# EAGLE board tulip breakout (EAGLE 9.6.2)
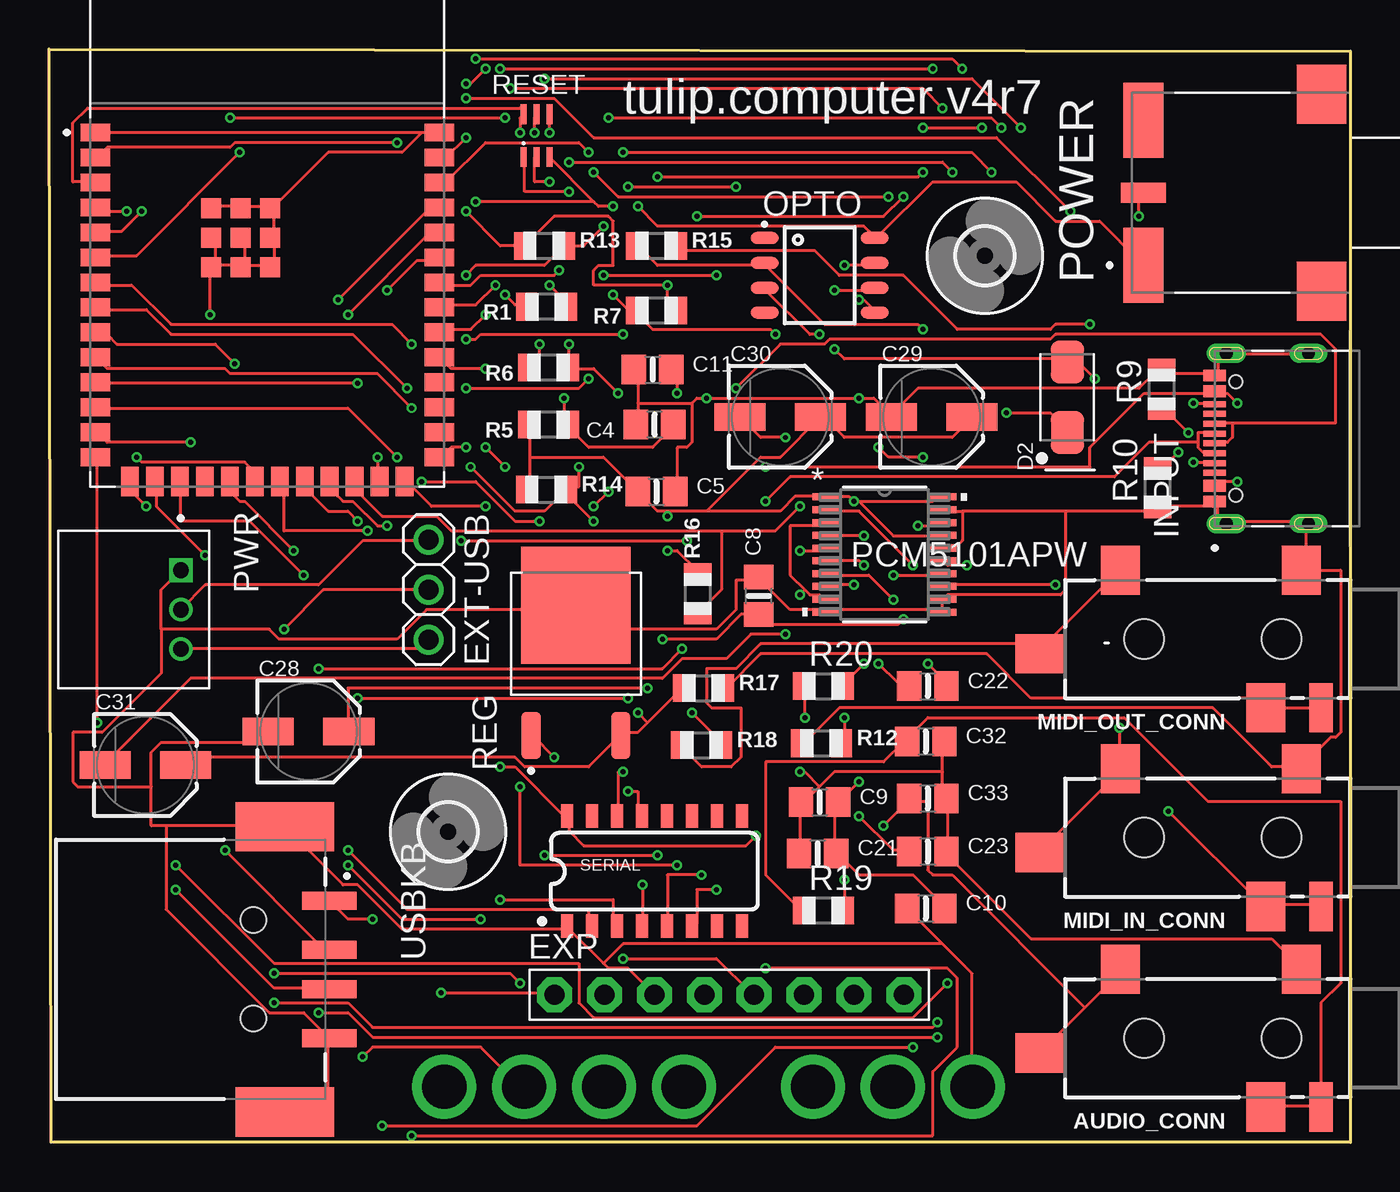
[diagram p0: board, top side]
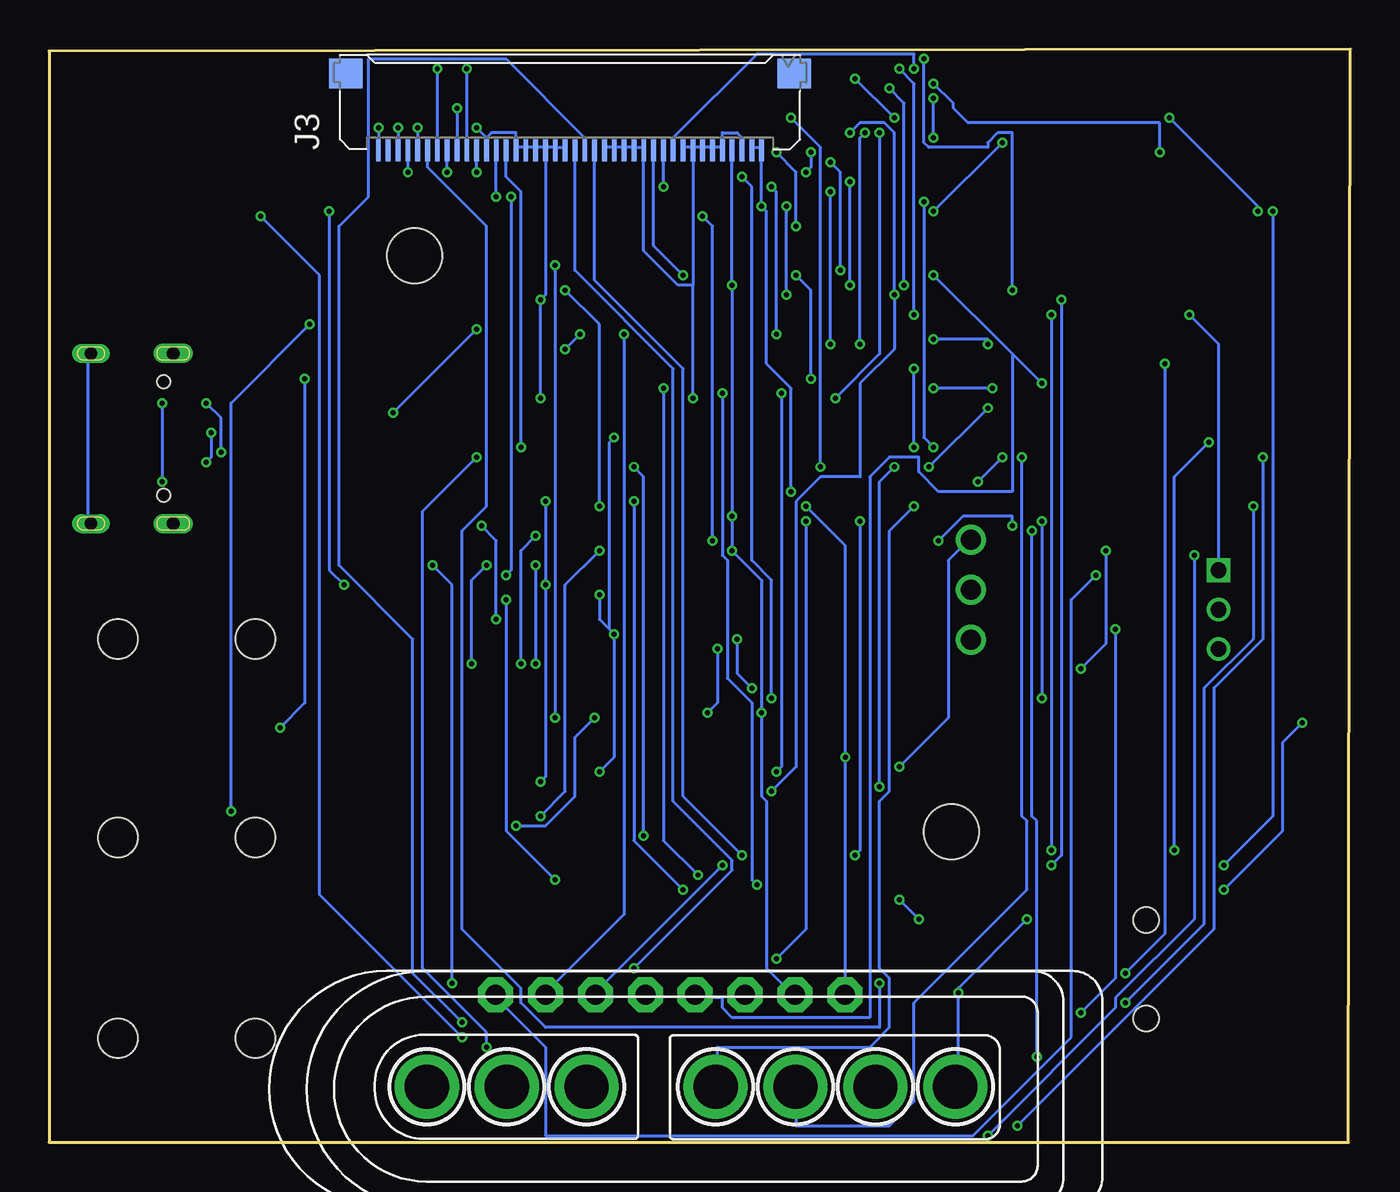
[diagram p1: board, bottom side, seen from below]

Size 66.2 x 55.6 mm. Coordinates in mm from the lower left corner, seen from the top.
Outline: 0.1,0 0,55.6 66.2,55.5 66.2,0 0.1,0
Copper layers (1*16): Top 0.035559375mm / dielectric 1.6mm / Bottom 0.035559375mm
Design rules "oshpark-2layer *": minimum track width 6mil, minimum drill 10mil, track to track 6mil, track to pad 6mil, pad to pad 6mil, via to via 6mil, smd to smd 6mil, copper to edge 0mil, drill to drill 6mil, minimum pad ring 5mil, minimum via ring 5mil, stop-mask expansion 2.5mil, vias tented up to drill 0mil, thermal gap 10mil
Net classes: 1 power: width 0.178 mm

## Footprints (pad centres in the part's own frame; a part is rotated, then mirrored left to right if it is on the bottom)
4UCONN_19269 = smd 2 x 2.5: 1 2.5,-3.5; 2 11.7,-3.5; 3 4.3,3.5 | smd 2.5 x 2: 4 15.8,0.75 | smd 1.2 x 2.5: 5 1.5,3.5 | hole 2: 3.5,0; 10.5,0
0805-NO = smd 1.24 x 1.5: 1 -0.95,0; 2 0.95,0
PANASONIC_C = smd 2.6 x 1.4: + 2.05,0; - -2.05,0
DIOM449X264X300L114X135N = smd 2.17 x 1.69: A 1.795,0; C -1.795,0
XCVR_ESP32-S3-WROOM-2-N32R8V = smd 1.5 x 0.9: 1 -8.75,5.26; 2 -8.75,3.99; 3 -8.75,2.72; 4 -8.75,1.45; 5 -8.75,0.18; 6 -8.75,-1.09; 7 -8.75,-2.36; 8 -8.75,-3.63; 9 -8.75,-4.9; 10 -8.75,-6.17; 11 -8.75,-7.44; 12 -8.75,-8.71; 13 -8.75,-9.98; 14 -8.75,-11.25; 27 8.75,-11.25; 28 8.75,-9.98; 29 8.75,-8.71; 30 8.75,-7.44; 31 8.75,-6.17; 32 8.75,-4.9; 33 8.75,-3.63; 34 8.75,-2.36; 35 8.75,-1.09; 36 8.75,0.18; 37 8.75,1.45; 38 8.75,2.72; 39 8.75,3.99; 40 8.75,5.26 | smd 0.9 x 1.5: 15 -6.985,-12.5; 16 -5.715,-12.5; 17 -4.445,-12.5; 18 -3.175,-12.5; 19 -1.905,-12.5; 20 -0.635,-12.5; 21 0.635,-12.5; 22 1.905,-12.5; 23 3.175,-12.5; 24 4.445,-12.5; 25 5.715,-12.5; 26 6.985,-12.5 | smd 1 x 1: 41_1 -1.36,-0.09; 41_2 -2.86,-0.09; 41_3 0.14,-0.09; 41_4 -2.86,-1.59; 41_5 -1.36,-1.59; 41_6 0.14,-1.59; 41_7 -2.86,1.41; 41_8 -1.36,1.41; 41_9 0.14,1.41
1X08-BIG = drill 1.016 pad 1.778 octagon: 1 -8.89,0; 2 -6.35,0; 3 -3.81,0; 4 -1.27,0; 5 1.27,0; 6 3.81,0; 7 6.35,0; 8 8.89,0
1X03 = drill 1.016: 1 -2.54,0; 2 0,0; 3 2.54,0
2,8 = hole 2.8: 0,0
VALCON_CSP-USC16-TR = smd 0.3 x 1.14: A1 -3.35,0; A4 -2.55,0; A5 -1.25,0; A6 -0.25,0; A7 0.25,0; A8 1.25,0; A9 2.55,0; A12 3.35,0; B1 3.05,0; B4 2.25,0; B5 1.75,0; B6 0.75,0; B7 -0.75,0; B8 -1.75,0; B9 -2.25,0; B12 -3.05,0 | drill 0.65 pad 1 long: S1 -4.325,-0.59; S2 4.325,-0.59 | drill 0.65 pad 0.9 long: S3 -4.325,-4.77; S4 4.325,-4.77 | hole 0.65: -2.89,-1.07; 2.89,-1.07
XF2M-4015-1F-REVERSE = smd 1.1 x 0.25: 1 -2.54,9.75; 2 -2.54,9.25; 3 -2.54,8.75; 4 -2.54,8.25; 5 -2.54,7.75; 6 -2.54,7.25; 7 -2.54,6.75; 8 -2.54,6.25; 9 -2.54,5.75; 10 -2.54,5.25; 11 -2.54,4.75; 12 -2.54,4.25; 13 -2.54,3.75; 14 -2.54,3.25; 15 -2.54,2.75; 16 -2.54,2.25; 17 -2.54,1.75; 18 -2.54,1.25; 19 -2.54,0.75; 20 -2.54,0.25; 21 -2.54,-0.25; 22 -2.54,-0.75; 23 -2.54,-1.25; 24 -2.54,-1.75; 25 -2.54,-2.25; 26 -2.54,-2.75; 27 -2.54,-3.25; 28 -2.54,-3.75; 29 -2.54,-4.25; 30 -2.54,-4.75; 31 -2.54,-5.25; 32 -2.54,-5.75; 33 -2.54,-6.25; 34 -2.54,-6.75; 35 -2.54,-7.25; 36 -2.54,-7.75; 37 -2.54,-8.25; 38 -2.54,-8.75; 39 -2.54,-9.25; 40 -2.54,-9.75 | smd 1.5 x 1.7: M1 1.36,11.4; M2 1.36,-11.4
SOIC127P610X331-8N = smd 1.4 x 0.6: 1 -2.8,1.905; 2 -2.8,0.635; 3 -2.8,-0.635; 4 -2.8,-1.905; 5 2.8,-1.905; 6 2.8,-0.635; 7 2.8,0.635; 8 2.8,1.905
PW20_TEX = smd 1.473 x 0.356: 1 -2.921,2.925; 2 -2.921,2.275; 3 -2.921,1.625; 4 -2.921,0.975; 5 -2.921,0.325; 6 -2.921,-0.325; 7 -2.921,-0.975; 8 -2.921,-1.625; 9 -2.921,-2.275; 10 -2.921,-2.925; 11 2.921,-2.925; 12 2.921,-2.275; 13 2.921,-1.625; 14 2.921,-0.975; 15 2.921,-0.325; 16 2.921,0.325; 17 2.921,0.975; 18 2.921,1.625; 19 2.921,2.275; 20 2.921,2.925
SW_500ASSP1SM6QE = smd 3.81 x 2.03: 1 -3.685,4.535; 3 3.685,4.535 | smd 1.02 x 2.29: 2 0,4.535 | smd 3 x 2.5: S1 -5,-4.535; S2 5,-4.535
TE_440055-3 = drill 0.8 pad 1.15 square: 1 0,0 | drill 0.8 pad 1.15: 2 2.007,0; 3 4.013,0
R0805 = smd 1.1 x 1.4: 1 -1,0; 2 1,0
DPAK456P972X240-3N = smd 2.4 x 0.98: 1 -4.2,2.28; 2 -4.2,-2.28 | smd 5.96 x 5.57: 3 2.42,0
SOT236 = smd 0.3 x 1: 1 -0.66,-1.09; 2 0,-1.09; 3 0.66,-1.09; 4 0.66,1.09; 5 0,1.09; 6 -0.66,1.09
SO016 = smd 0.6 x 1.2: 1 -4.445,-2.8; 2 -3.175,-2.8; 3 -1.905,-2.8; 4 -0.635,-2.8; 5 0.635,-2.8; 6 1.905,-2.8; 7 3.175,-2.8; 8 4.445,-2.8; 9 4.445,2.8; 10 3.175,2.8; 11 1.905,2.8; 12 0.635,2.8; 13 -0.635,2.8; 14 -1.905,2.8; 15 -3.175,2.8; 16 -4.445,2.8
SNESCONN = drill 2.25 pad 3.25: 5V 0,4.064; CLOCK 4.064,4.064; D0 12.192,4.064; D1 18.756,4.064; GND 26.884,4.064; IO 22.82,4.064; LATCH 8.128,4.064
SAMTEC_USB-A-S-X-X-SM2 = smd 0.9 x 2.8: 01 -3.5,3.85; 02 -1,3.85; 03 1,3.85; 04 3.5,3.85 | smd 2.5 x 5: S1 -7.25,1.6; S2 7.25,1.6 | hole 1.3: -2.5,0; 2.5,0

## Placement (x,y rotation side)
AUDIO_CONN  19269  [4UCONN_19269]  66.2,5.3 180 top
C4  4.7uF  [0805-NO]  30.8,36.5 180 top
C5  4.7uF  [0805-NO]  30.9,33.1 0 top
C8  0.1uF  [0805-NO]  36.1,27.8 90 top
C9  0.1uF  [0805-NO]  39.2,17.3 0 top
C10  0.1uF  [0805-NO]  44.6,11.9 0 top
C11  10uF  [0805-NO]  30.7,39.3 0 top
C21  0.1uF  [0805-NO]  39.1,14.7 0 top
C22  2.2uF  [0805-NO]  44.7,23.2 0 top
C23  2.2uF  [0805-NO]  44.7,14.8 0 top
C28  10uF  [PANASONIC_C]  13.2,20.9 0 top
C29  10uF  [PANASONIC_C]  44.9,36.9 0 top
C30  10uF  [PANASONIC_C]  37.2,36.9 0 top
C31  10uF  [PANASONIC_C]  4.9,19.2 0 top
C32  2.2nF  [0805-NO]  44.6,20.4 0 top
C33  2.2nF  [0805-NO]  44.7,17.5 0 top
D2  EGF1A  [DIOM449X264X300L114X135N]  51.8,37.9 90 top
ESP32S3  ESP32-S3-WROOM-2-N32R8V  [XCVR_ESP32-S3-WROOM-2-N32R8V]  11.1,46.1 0 top
EXP  [1X08-BIG]  34.6,7.5 0 top
EXT-USB  [1X03]  19.3,28.1 270 top
H1  MOUNT-HOLE2.8  [2,8]  20.3,15.8 0 top
H2  MOUNT-HOLE2.8  [2,8]  47.6,45.1 0 top
INPUT  CSP-USC16-TR  [VALCON_CSP-USC16-TR]  59.3,35.8 90 top
J3  40PINFPC15-1F-REV  [XF2M-4015-1F-REVERSE]  39.7,53 90 bottom
MIDI_IN_CONN  19269  [4UCONN_19269]  66.2,15.5 180 top
MIDI_OUT_CONN  19269  [4UCONN_19269]  66.2,25.6 180 top
OPTO  VO0601T  [SOIC127P610X331-8N]  39.2,44.1 0 top
PCM  PCM5101APW  [PW20_TEX]  42.5,29.9 0 top
POWER  500ASSP1SM6QE  [SW_500ASSP1SM6QE]  60.2,48.3 90 top
PWR  440055-3  [TE_440055-3]  6.7,29.1 270 top
R1  100k  [R0805]  25.3,42.5 180 top
R5  10k  [R0805]  25.4,36.5 180 top
R6  100k  [R0805]  25.4,39.4 180 top
R7  10k  [R0805]  30.9,42.3 180 top
R9  5.1K  [R0805]  56.6,38.3 90 top
R10  5.1K  [R0805]  56.4,33.3 90 top
R12  4.7K  [R0805]  39.3,20.3 0 top
R13  4.7K  [R0805]  25.2,45.6 0 top
R14  4.7K  [R0805]  25.3,33.2 0 top
R15  220  [R0805]  30.9,45.6 0 top
R16  470  [R0805]  33,27.9 90 top
R17  33  [R0805]  33.3,23.1 0 top
R18  10  [R0805]  33.2,20.2 0 top
R19  470  [R0805]  39.4,11.8 0 top
R20  470  [R0805]  39.4,23.2 0 top
REG  LD29150DT33R  [DPAK456P972X240-3N]  26.8,24.9 90 top
RESET  MBT3904DW1T1G  [SOT236]  24.8,51.2 0 top
SERIAL  CH340C  [SO016]  30.8,13.8 0 top
SNES  SNESCONN  [SNESCONN]  20.1,6.9 180 bottom
USBKB  USB-A-S-X-X-SM2  [SAMTEC_USB-A-S-X-X-SM2]  10.4,8.8 270 top

## Library data of the parts
AUDIO_CONN C4 C5 C8-C11 C21-C23 C28-C33 MIDI_IN_CONN MIDI_OUT_CONN = microbuilder
D2 = EGF1A; AVAILABILITY: In Stock; DESCRIPTION: Diode Standard 50 V 1A Surface Mount DO-214AC (SMA); MF: ON Semiconductor; MP: EGF1A; PACKAGE: SMA-2 ON Semiconductor; PRICE: None; PURCHASE-URL: https://pricing.snapeda.com/search/part/EGF1A/?ref=eda
ESP32S3 = ESP32-S3-WROOM-2-N32R8V; AVAILABILITY: In Stock; DESCRIPTION: Bluetooth, WiFi 802.11b/g/n, Bluetooth v5.0 Transceiver Module 2.4GHz PCB Trace Surface Mount; MF: Espressif Systems; MP: ESP32-S3-WROOM-2-N32R8V; PACKAGE: Package; PRICE: None; PURCHASE-URL: https://pricing.snapeda.com/search/part/ESP32-S3-WROOM-2-N32R8V/?ref=eda
EXP EXT-USB J3 R1 R5-R7 R9 R10 R12-R20 = adafruit
H1 H2 = holes
INPUT = CSP-USC16-TR; AVAILABILITY: In Stock; DESCRIPTION: CSP-USC16-TR Valcon USB Type C Surface Mount PCB Socket; MF: Valcon; MP: CSP-USC16-TR; PACKAGE: None; PRICE: None; PURCHASE-URL: https://pricing.snapeda.com/search/part/CSP-USC16-TR/?ref=eda
OPTO = VO0601T; DESCRIPTION: Logic Output Optoisolator 10MBd Open Drain 4000Vrms 1 Channel 5kV/µs CMTI 8-SOIC; DIGI-KEY_PART_NUMBER: 751-1377-2-ND; MF: Vishay Semiconductors; MP: VO0601T; PACKAGE: None; PURCHASE-URL: https://pricing.snapeda.com/search/part/VO0601T/?ref=eda
PCM = pcm5101apw; COPYRIGHT: Copyright (C) 2022 Ultra Librarian. All rights reserved.; DIGI-KEY_PART_NUMBER_1: PCM5101APW-ND; MANUFACTURER_PART_NUMBER: PCM5101APW; MFR_NAME: Texas Instruments
POWER = 500ASSP1SM6QE; DESCRIPTION: Slide Switch SPDT Surface Mount, Right Angle; DIGI-KEY_PART_NUMBER: EG5810TR-ND; MF: E-Switch; MP: 500ASSP1SM6QE; PACKAGE: None; PURCHASE-URL: https://pricing.snapeda.com/search/part/500ASSP1SM6QE/?ref=eda
PWR = 440055-3; COMMENT: 440055-3; DESCRIPTION: Connector Header Through Hole, Right Angle 3 position 0.079 (2.00mm); DIGI-KEY_PART_NUMBER: A100044-ND; EU_ROHS_COMPLIANCE: Compliant; MF: TE Connectivity; MP: 440055-3; PACKAGE: None; PURCHASE-URL: https://pricing.snapeda.com/search/part/440055-3/?ref=eda
REG = LD29150DT33R; DESCRIPTION: Linear Voltage Regulator IC Positive Fixed 1 Output 1.5A DPAK; DIGI-KEY_PART_NUMBER: 497-1496-2-ND; MF: STMicroelectronics; MP: LD29150DT33R; PACKAGE: TO-252 STMicroelectronics; PURCHASE-URL: https://pricing.snapeda.com/search/part/LD29150DT33R/?ref=eda
RESET = MBT3904DW1T1G; AVAILABILITY: In Stock; DESCRIPTION: Bipolar (BJT) Transistor Array 2 NPN (Dual) 40V 200mA 300MHz 150mW Surface Mount SC-88/SC70-6/SOT-363; MF: ON Semiconductor; MP: MBT3904DW1T1G; PACKAGE: SC-88-6 ON Semiconductor; PRICE: None; PURCHASE-URL: https://pricing.snapeda.com/search/part/MBT3904DW1T1G/?ref=eda
SERIAL = SparkFun-IC-Comms; PROD_ID: IC-14038
SNES = gamepad-conn
USBKB = USB-A-S-X-X-SM2; AVAILABILITY: In Stock; DESCRIPTION: USB-A (USB TYPE-A) USB 2.0 Receptacle Connector 4 Position Surface Mount, Right Angle; MF: Samtec; MP: USB-A-S-F-W-SM2-TR; PACKAGE: None; PRICE: None; PURCHASE-URL: https://pricing.snapeda.com/search/part/USB-A-S-F-W-SM2-TR/?ref=eda

## Nets
3V3: C5.1 C9.2 C10.2 C21.2 C29.+ C30.+ C31.+ ESP32S3.2 EXP.2 J3.37 PCM.1 PCM.8 PCM.17 PCM.20 R5.2 R7.1 R13.1 R14.1 R16.2 R17.1 REG.2
5V: EXP.1 J3.39 J3.40 OPTO.8 POWER.1 REG.1 SNES.5V USBKB.01
5V_IN: EXT-USB.3 PWR.3
5V_USB: EXT-USB.1 INPUT.A4 INPUT.A9 INPUT.B4 INPUT.B9 PWR.2 SERIAL.16
!DTR: R1.2 RESET.4 SERIAL.13
!RTS: R6.1 RESET.1 SERIAL.14
AGND: AUDIO_CONN.1 C9.1 C21.1 C23.2 C30.- C31.- C32.2 C33.2 PCM.3 PCM.9
B6: ESP32S3.20 J3.14
B7: ESP32S3.23 J3.13
BCLK: ESP32S3.39 PCM.13
BLEN: ESP32S3.32 J3.10
D+: ESP32S3.14 USBKB.03
D-: ESP32S3.13 USBKB.02
DE: ESP32S3.35 J3.7
DIN: ESP32S3.38 PCM.14
DN1: INPUT.A7 INPUT.B7 SERIAL.6
DP1: INPUT.A6 INPUT.B6 SERIAL.5
ESP32_EN: C4.1 ESP32S3.3 R5.1 RESET.6
EXT-USB: EXT-USB.2 POWER.2
G5: ESP32S3.12 J3.23
G6: ESP32S3.15 J3.22
G7: ESP32S3.16 J3.21
GND: C4.2 C5.2 C8.2 C10.1 C11.1 C28.- C29.- ESP32S3.1 ESP32S3.40 ESP32S3.41_1 ESP32S3.41_2 ESP32S3.41_3 ESP32S3.41_4 ESP32S3.41_5 ESP32S3.41_6 ESP32S3.41_7 ESP32S3.41_8 ESP32S3.41_9 EXP.3 INPUT.A1 INPUT.A12 INPUT.B1 INPUT.B12 INPUT.S1 INPUT.S2 INPUT.S3 INPUT.S4 J3.5 J3.12 J3.15 J3.16 J3.17 J3.18 J3.19 J3.20 J3.24 J3.25 J3.26 J3.27 J3.28 J3.32 J3.33 J3.34 J3.35 J3.36 J3.38 MIDI_IN_CONN.1 MIDI_OUT_CONN.1 OPTO.5 PCM.10 PCM.11 PCM.12 PCM.16 PCM.19 PWR.1 R9.2 R10.1 R12.1 REG.3 SERIAL.1 SNES.GND USBKB.04 USBKB.S1 USBKB.S2
GPIO10: ESP32S3.18
HSYNC: ESP32S3.33 J3.9
INT: ESP32S3.5 J3.1
IO0: ESP32S3.27 EXP.7 R7.2 RESET.3
IO9: ESP32S3.17 EXP.8
IO38: ESP32S3.31 EXP.6
JOY_CLK: ESP32S3.21 SNES.CLOCK
JOY_D0: ESP32S3.26 SNES.D0
JOY_LATCH: ESP32S3.25 SNES.LATCH
LOUT: AUDIO_CONN.2 AUDIO_CONN.4 C33.1 R20.1
LRC: ESP32S3.4 PCM.15
MIDI_IN: ESP32S3.24 OPTO.6 R16.1
MIDI_IN_SINK: D2.A MIDI_IN_CONN.2 MIDI_IN_CONN.4 OPTO.3
MIDI_IN_SOURCE: MIDI_IN_CONN.3 MIDI_IN_CONN.5 R15.2
MIDI_OUT: ESP32S3.19 R18.2
MIDI_OUT_SINK: MIDI_OUT_CONN.2 MIDI_OUT_CONN.4 R18.1
MIDI_OUT_SOURCE: MIDI_OUT_CONN.3 MIDI_OUT_CONN.5 R17.2
N$1: R1.1 RESET.2
N$2: R6.2 RESET.5
N$3: INPUT.B5 R10.2
N$7: C8.1 C28.+ PCM.18
N$8: PCM.7 R19.2
N$16: C22.1 PCM.4
N$18: C22.2 PCM.2
N$30: D2.C OPTO.2 R15.1
N$32: OPTO.7 R12.2
N$38: C11.2 SERIAL.4
N$42: INPUT.A5 R9.1
OUTL: PCM.6 R20.2
PCLK: ESP32S3.22 J3.11
PWM: ESP32S3.9 J3.6
R5: ESP32S3.6 J3.31
R6: ESP32S3.7 J3.30
R7: ESP32S3.8 J3.29
ROUT: AUDIO_CONN.3 AUDIO_CONN.5 C32.1 R19.1
SCL: ESP32S3.10 EXP.5 J3.3 R14.2
SDA: ESP32S3.11 EXP.4 J3.4 R13.2
UART0_RXD: ESP32S3.36 SERIAL.2
UART0_TXD: ESP32S3.37 SERIAL.3
VNEG: C23.1 PCM.5
VSYNC: ESP32S3.34 J3.8

## Tracks (layer width: path | path; a pad name or v marks a point on that pad's centre or on a via)
3V3  (via drill 0.25)
  Top 0.152: C29.+ 46.95,36.85 45.95,35.85 40.45,35.85 39.45,36.85 C30.+ 37.2,34.85 36.2,34.85 33.45,32.1 | C10.2 45.45,12.1 43.95,13.6 41.2,13.6 40.2,14.6 C21.2 39.95,14.85 39.95,17.1 C9.2 v41.2,18.35 | 24.45,34.85 24.45,36.35 R5.2 | 24.45,34.85 24.45,33.35 R14.1 | 24.45,34.85 28.2,34.85 C5.1 30.95,32.1 31.45,32.1 | v40.95,28.35 39.7,28.35 PCM.8 | 41.2,32.6 42.95,30.85 45.2,30.85 PCM.17 | 41.2,32.6 44.95,32.6 45.2,32.85 PCM.20 | 41.2,32.6 v40.95,32.6 40.7,32.85 39.7,32.85 PCM.1 39.45,32.85 37.95,32.85 37.2,32.1 33.45,32.1 | 33.45,32.1 31.45,32.1 | 30.45,21.35 29.95,20.85 29.2,20.85 REG.2 28.95,20.6 27.45,19.1 24.2,19.1 23.7,19.6 7.2,19.6 6.95,19.35 C31.+ | 30.45,21.35 32.2,23.1 R17.1 | R7.1 31.7,42.35 31.45,42.35 v31.45,43.6 27.7,43.6 27.7,44.35 27.95,44.6 28.7,44.6 28.7,46.85 28.45,47.1 25.7,47.1 R13.1 22.95,45.6 v21.2,47.35 | v31.45,30.1 31.95,30.1 32.95,29.1 R16.2 | v17.7,50.85 9.45,50.85 9.2,50.6 2.95,50.6 2.45,50.1 ESP32S3.2 | v29.95,21.85 30.45,21.35 | v31.45,31.85 31.45,32.1
  Bottom 0.152: v40.95,32.6 v40.95,28.35 40.95,18.6 v41.2,18.35 | J3.37 v31.45,43.6 v31.45,31.85 v31.45,30.1 29.95,28.6 v29.95,21.85 29.95,17.6 29.7,17.35 29.7,8.85 28.45,7.6 EXP.2 | v21.2,47.35 v17.7,50.85
5V  (via drill 0.25)
  Top 0.152: v29.95,47.6 30.95,46.6 41.45,46.6 41.95,46.1 OPTO.8 42.2,46.1 44.95,48.85 49.2,48.85 51.2,46.85 53.45,46.85 55.45,44.85 POWER.1 | v25.7,19.6 24.7,20.6 REG.1 | USBKB.01 15.2,11.35 v16.45,11.35 | v19.95,7.6 25.7,7.6 EXP.1 | v27.7,32.35 v28.45,33.1
  Bottom 0.152: J3.39 30.45,50.6 29.95,50.6 J3.40 v29.95,47.6 29.7,47.35 29.7,39.6 28.45,38.35 v28.45,33.1 | EXP.1 25.7,7.6 v25.7,19.6 25.7,30.35 v27.7,32.35 | v16.45,11.35 19.95,7.85 v19.95,7.6 19.95,2.85 SNES.5V
5V_IN
  Top 0.152: PWR.3 18.95,25.1 19.2,25.35 EXT-USB.3
5V_USB  (via drill 0.25)
  Top 0.152: 59.45,33.6 59.45,33.35 INPUT.A4 | 59.45,38.1 59.45,38.35 INPUT.A9 | v60.45,33.6 59.45,33.6 | v60.45,37.6 59.95,38.1 59.45,38.1 | 59.45,33.6 INPUT.B9 | 59.45,38.1 INPUT.B4 59.2,38.1 55.7,38.1 52.95,35.35 52.95,34.35 v36.45,34.35 | v22.95,19.1 23.7,19.1 26.2,16.6 SERIAL.16 26.45,16.6 26.45,15.85 27.2,15.1 35.45,15.1 v35.95,15.6 | PWR.2 7.95,28.35 13.7,28.35 15.95,30.6 19.2,30.6 EXT-USB.1
  Bottom 0.152: v60.45,37.6 v60.45,33.6 | v22.95,19.1 20.45,21.6 20.45,29.6 19.45,30.6 EXT-USB.1 | v36.45,34.35 35.95,33.85 v35.95,15.6
!DTR  (via drill 0.25)
  Top 0.152: v25.45,51.35 25.45,52.1 RESET.4 | v23.2,43.1 23.7,42.6 24.2,42.6 R1.2 | v29.45,17.85 29.95,17.85 29.95,16.6 SERIAL.13
  Bottom 0.152: v25.45,51.35 24.95,51.85 23.7,51.85 23.2,51.35 v23.2,43.1 23.2,40.35 24.95,38.6 24.95,33.85 26.95,33.85 28.2,32.6 28.2,19.1 v29.45,17.85
!RTS  (via drill 0.25)
  Top 0.152: v26.45,48.35 24.2,48.35 24.2,50.1 RESET.1 | v26.45,40.6 26.45,39.6 R6.1 26.45,39.35 27.7,39.35 v28.95,38.1 | v29.2,18.85 28.95,18.85 28.95,16.6 SERIAL.14
  Bottom 0.152: v26.45,40.6 v26.45,48.35 | v29.2,18.85 28.95,19.1 v28.95,38.1
AGND  (via drill 0.25)
  Top 0.152: C21.1 38.2,14.85 38.2,17.1 C9.1 38.45,17.35 39.2,18.1 | 45.45,18.85 45.45,17.6 C33.2 45.7,17.35 45.7,14.85 C23.2 45.7,14.6 49.95,10.35 62.2,10.35 63.7,8.85 AUDIO_CONN.1 | 45.45,18.85 45.45,20.35 C32.2 | 39.2,18.1 39.95,18.85 45.45,18.85 | 38.45,28.1 37.7,28.85 37.7,31.35 39.45,31.35 PCM.3 | 38.45,28.1 38.7,27.85 39.2,27.85 39.45,27.6 PCM.9 | v37.45,25.85 35.7,25.85 34.45,24.6 32.2,24.6 31.2,23.6 7.2,23.6 2.95,19.35 C31.- | 38.45,28.1 v38.2,27.85 | C30.- 36.2,35.85 v37.45,35.85 | 39.2,18.1 38.45,18.85 v38.2,18.85
  Bottom 0.152: 37.7,26.1 38.2,26.6 v38.2,27.85 | 37.7,26.1 v37.45,25.85 37.45,19.6 v38.2,18.85 | v37.45,35.85 37.7,35.6 37.7,26.1
B6  (via drill 0.25)
  Top 0.152: v42.2,35.35 42.7,34.85 v44.45,34.85 | v43.95,4.85 36.95,4.85 32.95,0.85 v16.95,0.85 | v4.45,34.85 4.7,34.6 9.95,34.6 10.45,34.1 10.45,33.6 ESP32S3.20
  Bottom 0.152: J3.14 42.95,49.1 42.2,48.35 v42.2,35.35 | v44.45,34.85 47.2,32.1 47.2,8.85 43.95,5.6 v43.95,4.85 | v16.95,0.85 6.95,10.85 6.95,23.1 4.45,25.6 v4.45,34.85
B7  (via drill 0.25)
  Top 0.152: v43.45,48.1 42.45,47.1 v32.95,47.1 | v20.95,30.6 v32.45,30.6 | v17.2,31.35 16.7,31.35 15.45,32.6 14.95,32.6 14.45,33.1 14.45,33.6 ESP32S3.23
  Bottom 0.152: v43.45,48.1 J3.13 | v32.95,47.1 32.45,46.6 v32.45,30.6 | v20.95,30.6 19.7,31.85 17.2,31.85 v17.2,31.35
BCLK  (via drill 0.25)
  Top 0.152: v51.2,28.35 45.45,28.35 PCM.13 | v51.95,47.35 48.2,51.1 27.7,51.1 25.7,53.1 v21.2,53.1 | v21.2,51.1 20.2,50.1 19.95,50.1 ESP32S3.39
  Bottom 0.152: v51.2,28.35 51.95,29.1 v51.95,47.35 | v21.2,51.1 v21.2,53.1
BLEN  (via drill 0.25)
  Top 0.152: v22.95,54.6 v44.95,54.6 | v22.2,42.1 21.45,41.35 19.95,41.35 ESP32S3.32
  Bottom 0.152: v44.95,54.6 J3.10 | v22.95,54.6 22.2,53.85 v22.2,42.1
D+  (via drill 0.25)
  Top 0.152: v2.45,21.35 2.45,34.85 ESP32S3.14 | v6.45,12.85 11.45,7.85 14.2,7.85 USBKB.03
  Bottom 0.152: v2.45,21.35 3.45,20.35 3.45,15.85 v6.45,12.85
D-  (via drill 0.25)
  Top 0.152: v7.2,35.6 2.95,35.6 2.45,36.1 ESP32S3.13 | v8.95,14.85 13.95,9.85 14.2,9.85 USBKB.02
  Bottom 0.152: v7.2,35.6 8.95,33.85 v8.95,14.85
DE  (via drill 0.25)
  Top 0.152: v46.45,54.6 45.95,55.1 v21.7,55.1 | v17.2,43.35 18.7,44.85 19.7,44.85 ESP32S3.35
  Bottom 0.152: v46.45,54.6 J3.7 | v21.7,55.1 21.7,50.85 21.45,50.6 18.45,50.6 18.45,50.85 17.95,51.35 17.2,51.35 v17.2,43.35
DIN  (via drill 0.25)
  Top 0.152: v42.95,28.85 45.2,28.85 PCM.14 | v42.7,48.1 28.95,48.1 v27.7,49.35 | v27.45,50.35 26.95,50.85 22.2,50.85 20.2,48.85 19.95,48.85 ESP32S3.38
  Bottom 0.152: v42.95,28.85 42.7,29.1 v42.7,48.1 | v27.7,49.35 27.45,49.6 v27.45,50.35
DN1  (via drill 0.25)
  Top 0.152: 58.45,35.6 58.45,36.1 59.2,36.1 INPUT.A7 | 58.45,35.6 58.45,35.35 58.7,35.1 59.2,35.1 INPUT.B7 | v33.95,12.85 32.95,12.85 32.95,11.1 SERIAL.6 | v36.45,32.6 37.7,33.85 54.2,33.85 55.95,35.6 58.45,35.6
  Bottom 0.152: v33.95,12.85 36.45,15.35 v36.45,32.6
DP1  (via drill 0.25)
  Top 0.152: 60.2,36.6 60.2,35.85 59.95,35.6 59.45,35.6 INPUT.A6 | 60.2,36.6 59.45,36.6 INPUT.B6 | v33.2,13.6 31.45,13.6 31.45,11.1 SERIAL.5 | v34.95,38.35 37.2,40.6 39.45,40.6 39.7,40.85 50.95,40.85 51.2,41.1 64.7,41.1 65.45,40.35 65.45,36.6 60.2,36.6
  Bottom 0.152: v33.2,13.6 34.95,15.35 v34.95,38.35
ESP32_EN  (via drill 0.25)
  Top 0.152: C4.1 31.7,36.35 30.7,35.35 27.45,35.35 26.45,36.35 R5.1 26.2,36.6 v26.2,37.85 | ESP32S3.3 2.2,48.85 1.2,48.85 1.2,51.85 1.95,52.6 23.95,52.6 24.2,52.35 RESET.6 24.2,52.1 23.95,52.1 v23.95,51.35
  Bottom 0.152: v26.2,37.85 23.95,40.1 v23.95,51.35
EXT-USB  (via drill 0.25)
  Top 0.152: v55.45,47.1 55.45,48.1 POWER.2 | v45.2,5.35 16.45,5.35 15.2,6.6 v13.7,6.6 | v11.95,26.1 13.95,28.1 EXT-USB.2
  Bottom 0.152: v55.45,47.1 52.45,44.1 52.45,12.6 v45.2,5.35 | v13.7,6.6 11.95,8.35 v11.95,26.1
G5  (via drill 0.25)
  Top 0.152: v25.2,14.6 v30.95,14.6 | v24.95,31.6 23.7,31.6 21.7,33.6 v18.95,33.6 | v17.7,34.85 15.2,37.35 2.45,37.35 ESP32S3.12
  Bottom 0.152: J3.23 38.45,43.85 33.95,39.35 33.95,17.6 v30.95,14.6 | v25.2,14.6 24.95,14.85 v24.95,31.6 | v17.7,34.85 v18.95,33.6
G6  (via drill 0.25)
  Top 0.152: v45.2,6.1 44.95,5.85 16.45,5.85 15.2,7.1 v11.45,7.1 | v4.95,32.35 4.2,33.1 4.2,33.6 ESP32S3.15
  Bottom 0.152: J3.22 38.95,51.1 42.95,55.1 49.95,55.1 49.95,48.1 51.45,46.6 51.45,29.35 47.7,25.6 47.7,8.6 v45.2,6.1 | v11.45,7.1 7.45,11.1 7.45,23.1 4.95,25.6 v4.95,32.35
G7  (via drill 0.25)
  Top 0.152: v36.45,8.85 45.7,8.85 46.2,8.35 46.2,4.85 44.95,3.6 44.95,0.35 v18.45,0.35 | v7.95,29.85 5.45,32.35 5.45,33.6 ESP32S3.16
  Bottom 0.152: J3.21 39.45,44.35 34.45,39.35 34.45,17.35 31.45,14.35 31.45,13.85 v36.45,8.85 | v18.45,0.35 11.95,6.85 11.95,7.35 7.95,11.35 v7.95,29.85
GND  (via drill 0.25)
  Top 0.152: USBKB.S2 12.2,1.6 14.2,1.6 14.2,5.1 USBKB.04 12.95,6.6 11.2,6.6 5.95,11.85 5.95,16.1 | 5.2,18.1 5.2,16.1 5.95,16.1 | 5.2,18.1 5.2,19.85 5.7,20.35 10.45,20.35 10.95,20.85 C28.- | 5.95,16.1 11.95,16.1 USBKB.S1 14.95,13.1 15.7,13.1 17.95,10.85 26.2,10.85 SERIAL.1 26.45,10.85 28.2,9.1 | 28.2,9.1 28.45,8.85 29.45,8.85 30.7,7.6 EXP.3 | 45.45,10.1 46.95,8.6 46.95,2.85 SNES.GND | 45.45,10.1 C10.1 | 28.2,9.1 29.2,10.1 45.45,10.1 | ESP32S3.41_7 8.45,47.6 9.7,47.6 ESP32S3.41_8 9.95,47.6 11.2,47.6 ESP32S3.41_9 | 8.45,44.6 8.45,45.85 ESP32S3.41_2 | 9.95,44.6 9.95,45.85 ESP32S3.41_1 | 8.45,44.6 9.7,44.6 ESP32S3.41_5 9.95,44.6 | 8.45,44.6 ESP32S3.41_4 8.2,44.35 v8.2,42.1 | 9.95,44.6 11.2,44.6 ESP32S3.41_6 11.45,44.6 11.45,45.85 ESP32S3.41_3 11.45,46.1 11.45,47.35 ESP32S3.41_9 | 18.95,51.35 19.7,51.35 ESP32S3.40 | 18.95,51.35 2.45,51.35 ESP32S3.1 | 18.95,51.35 17.95,50.35 14.2,50.35 11.45,47.6 ESP32S3.41_9 | PWR.1 5.7,28.1 5.7,26.1 | 5.7,26.1 11.2,26.1 11.7,25.6 17.7,25.6 19.2,27.1 26.7,27.1 REG.3 26.95,27.1 27.95,26.1 33.95,26.1 34.95,27.1 34.95,28.6 35.95,28.6 C8.2 36.2,28.6 37.7,27.1 39.45,27.1 PCM.10 39.7,27.1 45.2,27.1 PCM.11 45.45,27.1 45.45,27.6 | v44.45,51.6 v47.45,51.6 | v41.2,42.85 41.45,42.85 41.95,42.35 OPTO.5 | 29.95,37.6 29.95,39.1 C11.1 | 29.95,37.6 29.95,36.6 C4.2 | 32.7,37.6 32.7,35.6 32.45,35.35 31.95,35.35 31.95,33.1 C5.2 | 29.95,37.6 32.7,37.6 | 32.7,37.6 32.95,37.85 v33.45,37.85 v41.2,37.85 41.95,37.85 42.7,37.1 C29.- 42.95,37.1 44.2,38.35 55.45,38.35 56.2,39.1 56.45,39.1 R9.2 56.7,39.1 59.2,39.1 INPUT.A12 59.45,39.1 | 63.7,19.1 62.2,19.1 59.2,22.1 40.2,22.1 38.45,20.35 R12.1
  Top 0.152: 59.45,39.1 59.45,38.85 INPUT.B1 | 59.45,39.1 59.45,40.1 59.7,40.1 INPUT.S2 59.95,40.1 63.95,40.1 INPUT.S4 | 63.95,29.1 63.95,31.35 INPUT.S3 63.95,31.6 59.95,31.6 INPUT.S1 59.7,31.6 59.45,31.6 59.45,32.35 | 46.45,32.1 46.45,30.6 46.2,30.35 45.45,30.35 PCM.16 | 46.45,32.1 45.45,32.1 PCM.19 | 59.45,32.35 59.45,32.85 INPUT.B12 | 59.45,32.35 INPUT.A1 59.2,32.35 56.45,32.35 R10.1 56.2,32.1 51.7,32.1 | 51.7,32.1 46.45,32.1 | 45.45,27.6 45.7,27.85 51.45,27.85 51.7,28.1 51.7,32.1 | 45.45,27.6 PCM.12 | 63.7,19.1 65.2,20.6 65.45,20.6 65.7,20.85 65.7,29.1 63.95,29.1 | 63.7,19.1 MIDI_IN_CONN.1 | 63.95,29.1 MIDI_OUT_CONN.1 | 5.2,18.1 1.45,18.1 1.2,18.35 1.2,20.85 2.7,20.85 5.7,23.85 5.7,26.1
  Bottom 0.152: v8.2,42.1 6.7,40.6 PWR.1 | 40.45,50.6 39.95,50.6 J3.20 | 40.45,50.6 40.95,50.6 | 40.45,50.6 J3.19 | 40.95,50.6 41.45,50.6 | 40.95,50.6 J3.18 40.95,43.1 v41.2,42.85 v41.2,37.85 | 41.45,50.6 41.95,50.6 | 41.45,50.6 J3.17 | 41.95,50.6 42.45,50.6 | 41.95,50.6 J3.16 | 43.95,51.1 J3.12 | 43.95,51.1 43.7,51.35 42.45,51.35 42.45,50.6 | 42.45,50.6 J3.15 | v47.45,51.6 J3.5 | 43.95,51.1 v44.45,51.6 | 36.45,50.6 35.95,50.6 J3.28 35.95,45.35 34.2,43.6 33.45,43.6 | 36.45,50.6 36.95,50.6 | 36.45,50.6 J3.27 | 36.95,50.6 37.45,50.6 | 36.95,50.6 J3.26 | 37.45,50.6 37.95,50.6 J3.24 | 37.45,50.6 J3.25 | J3.38 30.95,51.1 31.2,51.35 31.95,51.35 31.95,50.6 | 31.95,50.6 32.45,50.6 | 31.95,50.6 J3.36 | 32.45,50.6 32.95,50.6 | 32.45,50.6 J3.35 | 32.95,50.6 33.45,50.6 | 32.95,50.6 J3.34 | 33.45,50.6 33.95,50.6 J3.32 | 33.45,50.6 J3.33 33.45,43.6 | v33.45,37.85 33.45,43.6 | INPUT.S4 64.2,40.1 64.2,31.6 INPUT.S3
HSYNC  (via drill 0.25)
  Top 0.152: v45.45,52.6 44.45,53.6 v23.45,53.6 | v22.7,43.6 21.7,42.6 19.95,42.6 ESP32S3.33
  Bottom 0.152: v45.45,52.6 J3.9 | v23.45,53.6 22.7,52.85 v22.7,43.6
INT  (via drill 0.25)
  Top 0.152: v49.45,51.6 46.95,54.1 v25.2,54.1 | v9.2,52.1 v23.2,52.1 | v4.7,47.35 3.7,46.35 2.45,46.35 ESP32S3.5
  Bottom 0.152: v49.45,51.6 J3.1 | v23.2,52.1 v25.2,54.1 | v9.2,52.1 4.7,47.6 v4.7,47.35
IO0  (via drill 0.25)
  Top 0.152: 27.7,47.85 27.95,47.6 v28.7,47.6 | 27.7,47.85 RESET.3 | v28.7,43.1 29.45,42.35 29.7,42.35 R7.2 29.95,42.1 30.7,41.35 36.7,41.35 v36.95,41.1 | v21.2,35.35 20.45,35.35 19.95,34.85 ESP32S3.27 | 27.7,47.85 v21.7,47.85
  Bottom 0.152: v28.7,43.1 v28.7,47.6 | v21.2,35.35 21.7,35.85 v21.7,47.85 | v36.95,41.1 36.95,11.6 40.95,7.6 EXP.7
IO9  (via drill 0.25)
  Top 0.152: v12.95,28.85 10.2,31.6 6.7,31.6 6.7,33.6 ESP32S3.17
  Bottom 0.152: v12.95,28.85 14.2,27.6 14.2,5.35 19.2,0.35 40.95,0.35 40.95,4.85 43.45,7.35 EXP.8
IO38  (via drill 0.25)
  Top 0.152: v22.2,39.35 20.45,39.35 19.95,39.85 ESP32S3.31 | v23.2,34.35 v22.2,35.35 | v23.95,18.1 23.95,14.1 v31.95,14.1
  Bottom 0.152: v22.2,35.35 v22.2,39.35 | v23.2,34.35 23.95,33.6 v23.95,18.1 | v31.95,14.1 38.2,7.85 38.2,7.6 EXP.6
JOY_CLK  (via drill 0.25)
  Top 0.152: v16.2,31.1 11.95,31.1 11.95,33.6 ESP32S3.21 | v15.95,4.35 16.45,4.85 21.95,4.85 23.95,2.85 SNES.CLOCK
  Bottom 0.152: v16.2,31.1 16.2,16.6 15.95,16.35 v15.95,4.35
JOY_D0  (via drill 0.25)
  Top 0.152: v22.2,32.35 19.45,32.35 18.2,33.6 ESP32S3.26
  Bottom 0.152: v22.2,32.35 23.45,31.1 23.45,17.85 23.95,17.35 23.95,8.85 23.45,8.35 23.45,5.85 24.45,4.85 32.2,4.85 32.2,2.85 SNES.D0
JOY_LATCH  (via drill 0.25)
  Top 0.152: v16.7,34.85 16.7,33.6 ESP32S3.25
  Bottom 0.152: v16.7,34.85 16.7,16.6 16.45,16.35 16.45,12.85 22.2,7.1 22.2,2.1 23.45,0.85 28.2,0.85 28.2,2.6 SNES.LATCH
LOUT  (via drill 0.25)
  Top 0.152: 52.7,6.85 54.45,8.6 AUDIO_CONN.2 | 52.7,6.85 AUDIO_CONN.4 | v38.45,21.6 38.45,23.1 R20.1 | v42.45,16.1 43.7,17.35 C33.1 43.95,17.35 44.7,17.35 44.7,13.85 44.95,13.6 45.95,13.6 52.7,6.85
  Bottom 0.152: v38.45,21.6 39.45,20.6 39.45,17.6 40.95,16.1 v42.45,16.1
LRC  (via drill 0.25)
  Top 0.152: v46.7,29.35 45.7,29.35 45.45,29.6 PCM.15 | v45.7,8.1 43.95,6.35 27.7,6.35 26.95,7.1 26.95,9.1 11.45,9.1 v6.45,14.1 | v3.95,47.35 2.45,47.35 ESP32S3.4
  Bottom 0.152: v46.7,29.35 45.7,28.35 v45.7,8.1 | v6.45,14.1 3.95,16.6 v3.95,47.35
MIDI_IN  (via drill 0.25)
  Top 0.152: R16.1 34.2,28.1 34.2,31.1 | 34.2,31.1 20.45,31.1 19.7,31.85 16.95,31.85 15.7,33.1 15.7,33.6 ESP32S3.24 | v39.95,43.35 41.95,43.35 OPTO.6 | v38.2,32.35 36.95,31.1 34.2,31.1
  Bottom 0.152: v39.95,43.35 38.2,41.6 v38.2,32.35
MIDI_IN_SINK  (via drill 0.25)
  Top 0.152: MIDI_IN_CONN.4 50.45,14.85 54.45,18.85 MIDI_IN_CONN.2 54.45,19.1 v54.45,21.1 | v39.2,41.1 38.7,41.1 36.45,43.35 OPTO.3 | v39.95,40.35 40.45,39.85 51.7,39.85 D2.A 51.95,39.6 52.45,39.6 v53.2,38.85
  Bottom 0.152: v39.95,40.35 v39.2,41.1 | v54.45,21.1 53.2,22.35 v53.2,38.85
MIDI_IN_SOURCE  (via drill 0.25)
  Top 0.152: v52.95,41.6 51.2,41.6 50.95,41.35 46.2,41.35 43.45,44.1 40.2,44.1 38.95,45.35 32.2,45.35 31.95,45.6 R15.2 | v56.95,16.85 61.7,12.1 MIDI_IN_CONN.3 61.95,12.1 64.7,12.1 MIDI_IN_CONN.5
  Bottom 0.152: v52.95,41.6 56.95,37.6 v56.95,16.85
MIDI_OUT  (via drill 0.25)
  Top 0.152: v32.7,21.85 34.2,20.35 R18.2 | v32.2,25.1 31.2,24.1 v13.7,24.1 | v12.45,30.1 9.95,32.6 9.7,32.6 9.2,33.1 ESP32S3.19
  Bottom 0.152: v32.7,21.85 32.2,22.35 v32.2,25.1 | v13.7,24.1 12.45,25.35 v12.45,30.1
MIDI_OUT_SINK
  Top 0.152: 50.2,24.85 49.7,25.35 36.2,25.35 34.95,24.1 33.45,24.1 33.45,22.35 33.7,22.1 35.2,22.1 35.2,19.6 34.7,19.1 33.2,19.1 32.2,20.1 R18.1 | 50.2,24.85 54.45,29.1 MIDI_OUT_CONN.2 | 50.2,24.85 MIDI_OUT_CONN.4
MIDI_OUT_SOURCE
  Top 0.152: R17.2 34.45,23.1 36.2,24.85 47.7,24.85 49.95,22.6 61.2,22.6 61.7,22.1 MIDI_OUT_CONN.3 MIDI_OUT_CONN.5
N$1  (via drill 0.25)
  Top 0.152: v25.45,48.85 24.7,48.85 24.7,50.1 RESET.2 | v25.45,43.6 26.45,42.6 R1.1
  Bottom 0.152: v25.45,43.6 v25.45,48.85
N$2  (via drill 0.25)
  Top 0.152: v24.7,51.35 24.7,52.1 RESET.5 | v24.95,40.6 24.95,39.6 24.45,39.6 R6.2
  Bottom 0.152: v24.7,51.35 24.95,51.1 v24.95,40.6
N$3  (via drill 0.25)
  Top 0.152: v58.2,37.6 59.2,37.6 INPUT.B5 | v57.45,35.1 56.7,34.35 56.45,34.35 R10.2
  Bottom 0.152: v58.2,37.6 57.45,36.85 v57.45,35.1
N$7  (via drill 0.25)
  Top 0.152: v44.2,31.35 45.2,31.35 PCM.18 | v43.45,26.6 43.2,26.35 36.7,26.35 36.2,26.85 C8.1 35.2,26.85 33.95,25.6 v31.2,25.6 | v30.45,23.1 15.2,23.1 15.2,21.1 C28.+
  Bottom 0.152: v44.2,31.35 43.45,30.6 v43.45,26.6 | v30.45,23.1 31.2,23.85 v31.2,25.6
N$8  (via drill 0.25)
  Top 0.152: v40.45,13.35 40.45,11.85 R19.2 | v42.95,27.6 41.7,28.85 39.7,28.85 PCM.7
  Bottom 0.152: v40.45,13.35 42.95,15.85 v42.95,27.6
N$16  (via drill 0.25)
  Top 0.152: v41.45,30.85 39.7,30.85 PCM.4 | v42.2,24.35 43.2,23.35 43.7,23.35 C22.1
  Bottom 0.152: v41.45,30.85 42.2,30.1 v42.2,24.35
N$18  (via drill 0.25)
  Top 0.152: v43.95,29.35 41.2,32.1 39.7,32.1 PCM.2 | v44.7,24.35 45.7,23.35 C22.2
  Bottom 0.152: v43.95,29.35 44.7,28.6 v44.7,24.35
N$30  (via drill 0.25)
  Top 0.152: R15.1 29.95,45.6 30.95,44.6 36.2,44.6 OPTO.2 36.45,44.6 39.45,41.6 44.2,41.6 v44.45,41.35 | v48.7,37.1 50.95,37.1 51.7,36.35 D2.C
  Bottom 0.152: v44.45,41.35 v48.7,37.1
N$32  (via drill 0.25)
  Top 0.152: v40.45,21.6 40.45,20.35 R12.2 | v40.45,44.6 41.95,44.6 OPTO.7
  Bottom 0.152: v40.45,44.6 v40.45,21.6
N$38  (via drill 0.25)
  Top 0.152: v30.2,13.1 30.2,11.1 SERIAL.4 | v31.95,38.1 31.95,39.1 31.7,39.1 C11.2
  Bottom 0.152: v30.2,13.1 30.45,13.35 30.45,22.35 31.7,23.6 31.7,29.6 31.95,29.85 v31.95,38.1
N$42  (via drill 0.25)
  Top 0.152: v58.2,34.6 59.2,34.6 INPUT.A5 | v57.95,36.1 56.95,37.1 56.7,37.1 R9.1
  Bottom 0.152: v58.2,34.6 57.95,34.85 v57.95,36.1
OUTL  (via drill 0.25)
  Top 0.152: v41.45,24.35 40.45,23.35 R20.2 | v41.45,29.35 41.2,29.6 39.7,29.6 PCM.6
  Bottom 0.152: v41.45,29.35 v41.45,24.35
PCLK  (via drill 0.25)
  Top 0.152: v44.45,49.35 44.2,49.1 v30.95,49.1 | v15.7,22.6 v29.45,22.6 | v15.7,31.6 15.2,32.1 14.2,32.1 13.2,33.1 13.2,33.6 ESP32S3.22
  Bottom 0.152: v44.45,49.35 J3.11 | v30.95,49.1 30.45,48.6 30.45,29.6 29.45,28.6 v29.45,22.6 | v15.7,31.6 v15.7,22.6
PWM  (via drill 0.25)
  Top 0.152: v23.95,8.1 23.45,8.6 v11.45,8.6 | v9.45,39.6 8.45,40.6 3.45,40.6 2.95,41.1 2.45,41.1 ESP32S3.9
  Bottom 0.152: J3.6 46.95,49.6 43.95,46.6 43.95,32.35 45.2,31.1 45.2,10.85 42.2,7.85 42.2,7.1 40.95,5.85 23.95,5.85 v23.95,8.1 | v11.45,8.6 9.45,10.6 v9.45,39.6
R5  (via drill 0.25)
  Top 0.152: v22.2,54.6 21.45,53.85 v21.2,53.85 | v9.7,50.35 4.45,45.1 2.45,45.1 ESP32S3.6
  Bottom 0.152: J3.31 34.45,51.1 30.2,55.35 22.2,55.35 v22.2,54.6 | v21.2,53.85 20.2,52.85 20.2,52.6 19.45,51.85 9.7,51.85 v9.7,50.35
R6  (via drill 0.25)
  Top 0.152: v29.45,48.6 v34.95,48.6 | v29.2,41.1 21.95,41.1 21.7,40.85 v21.2,40.85 | v18.45,40.6 17.45,41.6 6.2,41.6 4.2,43.6 2.45,43.6 ESP32S3.7
  Bottom 0.152: v34.95,48.6 J3.30 | v29.45,48.6 29.2,48.35 v29.2,41.1 | v21.2,40.85 18.45,40.85 v18.45,40.6
R7  (via drill 0.25)
  Top 0.152: v28.2,44.1 v33.95,44.1 | v27.45,38.85 26.95,38.35 v21.2,38.35 | v18.2,38.35 15.45,41.1 6.2,41.1 4.95,42.35 2.45,42.35 ESP32S3.8
  Bottom 0.152: J3.29 35.45,45.6 v33.95,44.1 | v28.2,44.1 27.45,43.35 v27.45,38.85 | v18.2,38.35 v21.2,38.35
ROUT
  Top 0.152: 64.7,1.85 61.95,1.85 AUDIO_CONN.3 | R19.1 38.2,11.85 36.45,13.6 36.45,19.35 42.45,19.35 43.45,20.35 C32.1 43.7,20.6 44.7,21.6 54.7,21.6 58.95,17.35 65.7,17.35 65.7,8.1 64.7,7.1 64.7,1.85 | 64.7,1.85 AUDIO_CONN.5
SCL  (via drill 0.25)
  Top 0.152: v48.45,51.6 47.95,52.1 v28.45,52.1 | v26.95,34.35 26.95,33.35 26.45,33.35 R14.2 26.2,33.1 | v18.45,37.35 16.7,39.1 9.2,39.1 8.95,39.35 2.95,39.35 2.45,39.85 ESP32S3.10 | v21.45,34.35 23.7,32.1 25.2,32.1 26.2,33.1 | v29.2,9.35 33.95,9.35 35.7,7.6 EXP.5 | 26.2,33.1 v27.7,31.6
  Bottom 0.152: v48.45,51.6 J3.3 | v28.45,52.1 26.95,50.6 v26.95,34.35 | v21.45,34.35 v18.45,37.35 | v29.2,9.35 27.7,10.85 v27.7,31.6
SDA  (via drill 0.25)
  Top 0.152: v47.95,49.35 46.95,50.35 v29.2,50.35 | v28.2,46.6 27.2,45.6 R13.2 25.2,44.6 21.7,44.6 v21.2,44.1 | v15.7,38.6 2.45,38.6 ESP32S3.11
  Bottom 0.152: v47.95,49.35 J3.4 | v29.2,50.35 28.2,49.35 v28.2,46.6 | v21.2,44.1 17.2,40.1 | 17.2,40.1 v15.7,38.6 | 17.2,40.1 17.2,33.1 20.95,33.1 21.95,34.1 21.95,34.85 23.45,34.85 24.45,33.85 24.45,6.35 31.45,6.35 31.95,6.85 31.95,7.35 33.2,7.35 EXP.4
UART0_RXD  (via drill 0.25)
  Top 0.152: v15.2,14.85 18.2,11.85 27.45,11.85 27.45,11.1 SERIAL.2 | v15.2,42.1 19.2,46.1 19.7,46.1 ESP32S3.36
  Bottom 0.152: v15.2,42.1 v15.2,14.85
UART0_TXD  (via drill 0.25)
  Top 0.152: v22.95,12.35 28.7,12.35 28.7,11.1 SERIAL.3 | v21.95,11.35 17.95,11.35 v15.2,14.1 | v14.7,42.85 19.2,47.35 19.7,47.35 ESP32S3.37
  Bottom 0.152: v21.95,11.35 v22.95,12.35 | v15.2,14.1 14.7,14.6 v14.7,42.85
VNEG  (via drill 0.25)
  Top 0.152: v38.2,30.1 39.45,30.1 PCM.5 | v41.2,16.6 42.95,14.85 43.7,14.85 C23.1
  Bottom 0.152: v38.2,30.1 39.95,28.35 39.95,17.85 v41.2,16.6
VSYNC  (via drill 0.25)
  Top 0.152: v45.95,49.35 45.45,49.85 v26.45,49.85 | v25.95,44.35 25.7,44.1 21.95,44.1 21.45,43.6 19.95,43.6 ESP32S3.34
  Bottom 0.152: v45.95,49.35 J3.8 | v26.45,49.85 25.95,49.35 v25.95,44.35

## Text on the board
tNames: RESET | tulip.computer v4r7
tValues: Close
Measures: All dimensions in inches | Units: Inches